# Altium PCB PCB1.PcbDoc (part 4 of 4)
Units mm, origin at the board's own origin, x right, y up, seen from the top; angles counter-clockwise.
Board outline 152.65 x 113.28 mm, 2 copper layers (Top Layer, Bottom Layer); 145 components, 136 nets, 617 pads, 371 vias.
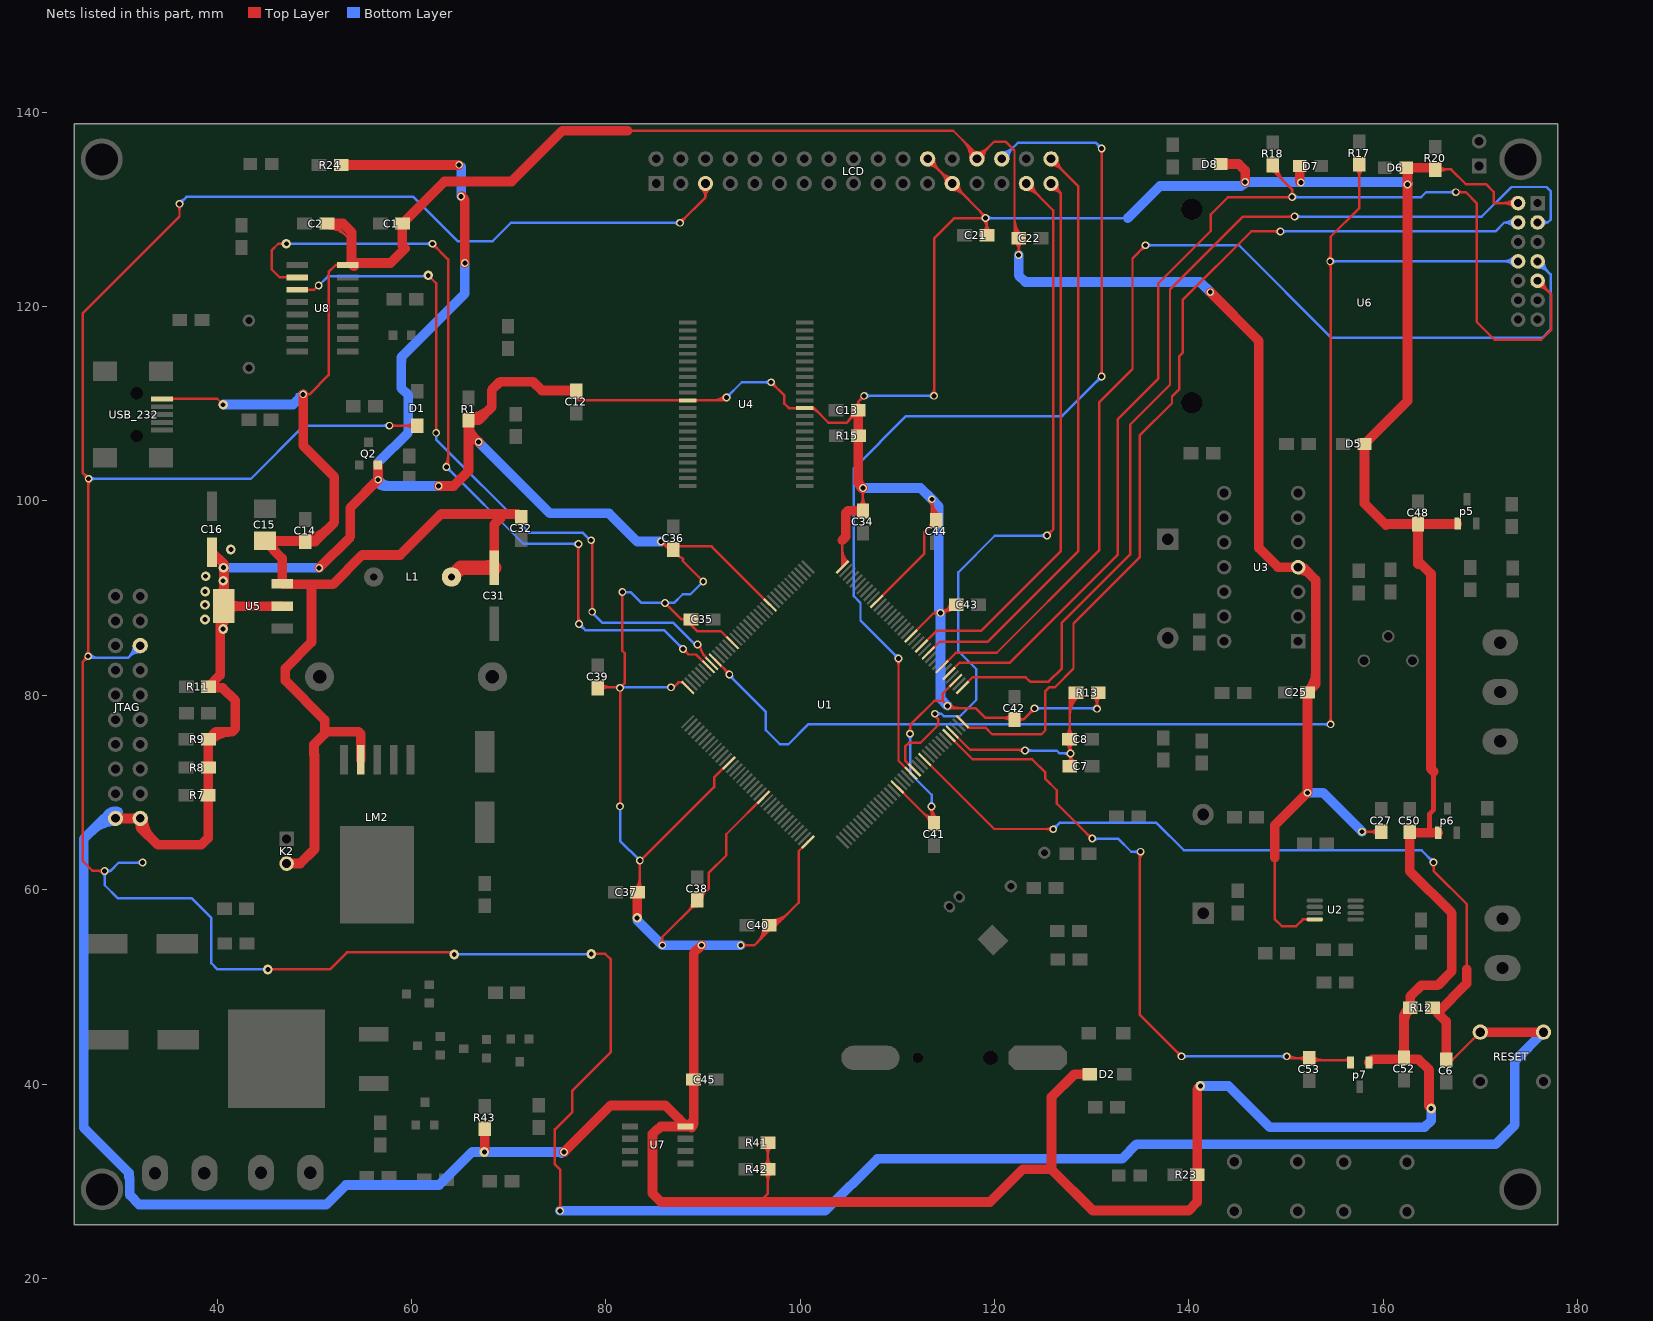
[diagram p4: the nets of this part, all layers, seen from the top]

## Via types
v1: diameter 0.8, hole 0.508, Top Layer to Bottom Layer, 296 vias
v2: diameter 1, hole 0.5, Top Layer to Bottom Layer, 75 vias

## Nets (pads, with @x,y where several pads share a name; then routed paths per layer and width w, separated by ;. In a path a pad name is that pad's centre, name@x,y a point inside that pad or via, vN(x,y) a via of type N, cw(c..) or ccw(c..) an arc to the next point about the centre after c; other vN are vias at no path point) (continued)
RESET: C6.1 D1.1 JTAG.15 LCD.5 R12.1 RESET.1 U1.25 | length 510.3
  Top Layer w0.254: v1@26.448,84.023 cw(c25.789,84.023) 26.255,83.557 cw(c26.721,83.091) v1@26.721,83.75 ; v1@26.499,102.286 ccw(c25.84,102.286) 26.306,102.752 ccw(c26.772,103.218) v1@26.772,102.559 ; v1@26.528,84.216 ccw(c26.062,84.682) 26.721,84.682 ccw(c27.38,84.682) v1@26.914,84.216 ; v1@26.579,102.093 cw(c26.235,101.749) 26.721,101.749 ; 26.721,101.504 cw(c27.553,101.504) v1@26.965,102.093 ; 27.702,61.951 cw(c27.702,61.205) v1@28.23,61.732 ; 27.825,61.951 ccw(c27.825,62.523) v1@28.23,62.118 ; v1@28.372,61.951 27.153,61.951 26.162,62.941 26.162,83.464 v1(26.721,84.023) 26.721,102.337 26.187,102.87 26.187,119.329 36.119,129.261 v1(36.119,130.581) ; v1@35.926,130.388 cw(c35.46,129.922) 36.119,129.922 cw(c36.778,129.922) v1@36.312,130.388 ; v2(45.212,51.791) 51.587,51.791 53.34,53.543 64.186,53.543 v2(64.389,53.34) ; v1(57.709,107.747) D1.1@60.579,107.747 ; v1@57.902,107.554 cw(c58.368,107.088) 58.368,107.747 cw(c58.368,108.406) v1@57.902,107.94 ; D1.1@60.209,107.377 ccw(c59.316,106.484) 59.316,107.747 ccw(c59.316,109.009) D1.1@60.209,108.117 ; v1@75.093,27.142 ccw(c74.627,27.608) 75.286,27.608 ccw(c75.945,27.608) v1@75.479,27.142 ; v1(75.286,26.949) 75.286,31.191 74.752,31.725 74.752,35.331 76.556,37.135 76.556,39.319 80.518,43.282 80.518,52.807 79.934,53.391 v2(78.486,53.391) ; v1(87.63,128.626) 90.246,131.242 ; v1@87.63,128.899 ccw(c87.63,129.558) 88.096,129.092 ccw(c88.562,128.626) v1@87.903,128.626 ; LCD.5@89.82,132.16 cw(c89.045,131.242) 90.246,131.242 ; LCD.5@89.984,132.354 cw(c89.507,131.789) 90.246,131.789 cw(c90.986,131.789) LCD.5@90.508,132.354 ; LCD.5@90.246,132.664 90.246,131.242 ; LCD.5@90.672,132.16 ccw(c91.448,131.242) 90.246,131.242 ; U1.25@112.809,73.401 119.967,66.243 v1@126.035,66.243 ; 125.314,66.243 cw(c125.314,65.497) v1@125.842,66.025 ; 125.437,66.243 ccw(c125.437,66.816) v1@125.842,66.411 ; v1@164.983,62.621 cw(c164.517,62.155) 165.176,62.155 cw(c165.835,62.155) v1@165.369,62.621 ; v1(165.176,62.814) 165.176,61.925 168.58,58.522 168.58,51.791 ; 167.132,42.494 RESET.1@169.977,45.339 ; RESET.1@176.01,44.872 ccw(c174.882,43.745) 174.882,45.339 ccw(c174.882,46.933) RESET.1@176.01,45.806 ; RESET.1@176.189,45.052 ccw(c175.496,44.358) 175.496,45.339 ccw(c175.496,46.32) RESET.1@176.189,45.626
  Top Layer w1: C6.1@166.47,42.494 166.47,46.434 165.571,47.334 168.58,50.343 168.58,51.791 ; RESET.1@169.977,45.339 RESET.1@176.477,45.339
  Bottom Layer w0.254: v1(26.721,84.023) 26.873,83.871 30.836,83.871 JTAG.15@32.08,85.115 ; v1@26.734,84.037 ccw(c27.135,84.437) 27.135,83.871 ; v1(26.772,102.286) 43.459,102.286 48.92,107.747 v1(57.709,107.747) ; v1@26.914,84.216 ccw(c27.748,85.05) 27.748,83.871 ; v1@26.965,102.093 cw(c27.431,101.627) 27.431,102.286 cw(c27.431,102.945) v1@26.965,102.479 ; v1@28.23,61.732 cw(c27.764,61.266) 28.423,61.266 cw(c29.082,61.266) v1@28.616,61.732 ; v1@28.632,61.75 cw(c29.007,61.437) 29.007,61.925 ; v1@28.632,62.1 ccw(c29.007,62.414) 29.007,61.925 ; JTAG.15@31.42,85.115 cw(c29.825,85.115) 30.953,83.988 cw(c32.08,82.861) JTAG.15@32.08,84.455 ; JTAG.15@31.674,85.115 cw(c30.693,85.115) 31.386,84.422 cw(c32.08,83.728) JTAG.15@32.08,84.709 ; v1@32.141,62.596 ccw(c31.675,62.13) 31.675,62.789 ccw(c31.675,63.448) v1@32.141,62.982 ; v1(32.334,62.789) 29.87,62.789 29.007,61.925 ; v1(36.119,130.581) 36.83,131.293 60.198,131.293 64.745,126.746 68.351,126.746 70.231,128.626 v1(87.63,128.626) ; v1@36.119,130.854 ccw(c36.119,131.513) 36.585,131.047 ccw(c37.051,130.581) v1@36.392,130.581 ; v2(45.212,51.791) 40.03,51.791 39.395,52.426 39.395,57.074 37.338,59.131 29.743,59.131 28.423,60.452 v1(28.423,61.925) 29.007,61.925 ; v1@57.516,107.554 ccw(c57.05,107.088) 57.05,107.747 ccw(c57.05,108.406) v1@57.516,107.94 ; v2@64.389,53.365 v2@78.461,53.365 ; v1@75.479,26.756 cw(c75.945,26.29) 75.945,26.949 cw(c75.945,27.608) v1@75.479,27.142 ; v1@87.437,128.433 ccw(c86.971,127.967) 86.971,128.626 ccw(c86.971,129.285) v1@87.437,128.819 ; v1(126.035,66.218) 126.695,66.878 136.652,66.878 139.471,64.059 163.932,64.059 v1(165.176,62.814) ; v1@126.035,66.491 ccw(c126.035,67.15) 126.501,66.684 ccw(c126.967,66.218) v1@126.308,66.218 ; v1@164.903,62.814 ccw(c164.244,62.814) 164.71,63.28 ccw(c165.176,63.746) v1@165.176,63.087
  Bottom Layer w1: v1(75.286,26.949) 102.565,26.949 107.925,32.309 133.121,32.309 134.62,33.807 171.577,33.807 173.533,35.763 173.533,42.395 RESET.1@176.477,45.339
RXD: U1.101 U8.3 | length 71.5
  Top Layer w0.254: U8.3@48.225,121.742 49.987,121.742 v1@50.267,122.022 ; v2(61.722,123.215) 62.535,122.403 v1@62.535,107.264 ; v1(78.588,88.595) v1@78.588,95.86 ; v1@89.706,85.217 ccw(c91.479,85.217) 90.226,83.963
  Bottom Layer w0.254: v1(50.444,122.174) 51.384,123.114 61.62,123.114 v2(61.722,123.215) ; v1(62.535,107.01) 62.535,106.324 72.111,96.749 77.597,96.749 v1@78.359,95.987 ; v1@78.613,88.468 79.604,87.478 86.919,87.478 v1@89.179,85.217
  other v1: 89.433,85.217 78.486,95.961
RXD2: U1.37 U6.3 | length 106.4
  Top Layer w0.254: U1.37@116.698,80.825 117.737,81.864 123.19,81.864 123.647,81.407 125.552,81.407 126.924,82.779 126.924,87.478 133.934,94.488 133.934,107.848 138.049,111.963 138.049,121.768 145.542,129.261 v1(150.876,129.261) ; v1@150.683,129.068 ccw(c150.217,128.602) 150.217,129.261 ccw(c150.217,129.92) v1@150.683,129.454
  Bottom Layer w0.254: v1(150.876,129.261) 170.129,129.261 173.177,132.309 176.784,132.309 177.241,131.851 177.241,128.981 176.918,128.658 ; v1@151.069,129.068 cw(c151.535,128.602) 151.535,129.261 cw(c151.535,129.92) v1@151.069,129.454 ; U6.3@175.87,128.658 176.918,128.658 ; U6.3@176.417,128.36 cw(c176.918,128.088) 176.918,128.658 ; U6.3@176.417,128.955 ccw(c176.918,129.227) 176.918,128.658
T_CS: LCD.33 U1.49 | length 59.9
  Top Layer w0.254: U1.49@112.455,85.068 114.027,86.639 118.618,86.639 126.797,94.818 126.797,131.674 ; LCD.33@125.806,132.664 126.797,131.674 ; LCD.33@125.845,132.26 cw(c125.913,131.552) 126.416,132.055 cw(c126.919,132.557) LCD.33@126.211,132.625 ; LCD.33@125.869,132.007 cw(c125.98,130.857) 126.797,131.674 ; LCD.33@126.464,132.601 ccw(c127.614,132.491) 126.797,131.674
T_MOSI: LCD.30 U1.21 | length 108.2
  Top Layer w0.254: v1@109.916,83.602 cw(c109.45,83.136) 110.109,83.136 cw(c110.768,83.136) v1@110.302,83.602 ; v1(110.109,83.795) 110.109,73.272 U1.21@111.395,71.987 ; v1@130.82,112.994 ccw(c130.354,113.46) 131.013,113.46 ccw(c131.672,113.46) v1@131.206,112.994 ; v1@130.82,136.078 cw(c130.354,135.612) 131.013,135.612 cw(c131.672,135.612) v1@131.206,136.078 ; v1@130.962,136.322 v1(131.013,136.271) v1(131.013,112.801)
  Bottom Layer w0.254: v1@109.836,83.795 ccw(c109.177,83.795) 109.643,84.261 ccw(c110.109,84.727) v1@110.109,84.068 ; v1(110.109,83.795) 106.197,87.706 106.197,89.51 105.512,90.195 105.512,103.353 110.896,108.737 126.949,108.737 v1(131.013,112.801) ; LCD.30@120.726,135.204 122.377,136.855 130.429,136.855 v1(131.013,136.271) ; LCD.30@120.726,135.611 ccw(c120.726,136.592) 121.42,135.898 ccw(c122.114,135.204) LCD.30@121.133,135.204 ; LCD.30@120.726,135.865 ccw(c120.726,137.459) 121.854,136.332 ccw(c122.981,135.204) LCD.30@121.387,135.204 ; v1@130.74,112.801 cw(c130.081,112.801) 130.547,112.335 cw(c131.013,111.869) v1@131.013,112.528 ; v1@130.74,136.271 ccw(c130.081,136.271) 130.547,136.737 ccw(c131.013,137.203) v1@131.013,136.544
T_PEN: LCD.31 U1.22 | length 83.2
  Top Layer w0.254: U1.22@111.748,72.34 110.795,73.294 110.795,74.727 111.176,75.108 112.344,75.108 114.198,76.962 114.198,77.546 113.843,77.902 v1(113.843,78.105) ; v1@114.068,77.951 ccw(c114.266,77.817) 114.097,77.648 ; LCD.31@123.266,132.004 cw(c123.266,130.409) 124.394,131.537 cw(c125.521,132.664) LCD.31@123.927,132.664 ; LCD.31@123.266,132.258 cw(c123.266,131.277) 123.96,131.97 cw(c124.654,132.664) LCD.31@123.673,132.664 ; LCD.31@123.266,132.664 126.035,129.896 126.035,97.079 v1(125.4,96.444) ; v1@125.4,96.717 ccw(c125.4,97.376) 125.866,96.91 ccw(c126.332,96.444) v1@125.673,96.444
  Bottom Layer w0.254: v1(113.843,78.105) 114.529,78.105 114.783,77.851 116.434,77.851 118.11,79.527 118.11,82.702 116.256,84.557 116.256,92.659 120.015,96.418 v1@125.4,96.418 ; v1@114.036,77.912 cw(c114.502,77.446) 114.502,78.105 cw(c114.502,78.764) v1@114.036,78.298 ; 124.679,96.418 ccw(c124.679,97.164) v1@125.207,96.637 ; 124.802,96.418 cw(c124.802,95.846) v1@125.207,96.251
T_SCK: LCD.34 U1.47 | length 65.4
  Top Layer w0.254: U1.47@113.163,84.361 113.19,84.361 114.351,85.522 119.304,85.522 128.6,94.818 128.6,132.41 LCD.34@125.806,135.204 ; LCD.34@125.806,134.544 cw(c125.806,132.949) 126.934,134.077 cw(c128.061,135.204) LCD.34@126.467,135.204 ; LCD.34@125.806,134.798 cw(c125.806,133.817) 126.5,134.51 cw(c127.194,135.204) LCD.34@126.213,135.204
TXD: U1.102 U8.2 | length 97.7
  Top Layer w0.254: v2(47.117,126.467) 46.279,126.467 45.593,125.781 45.593,123.85 46.431,123.012 U8.2@48.225,123.012 ; v1@62.154,126.194 cw(c62.154,125.535) 62.62,126.001 cw(c63.086,126.467) v1@62.427,126.467 ; v1(62.154,126.467) 63.754,124.866 63.754,103.683 v1(63.576,103.505) ; v1@63.383,103.698 ccw(c62.488,104.593) 63.754,104.593 ; v1@63.563,103.518 ccw(c63.101,103.98) 63.754,103.98 ; v1@76.972,95.387 cw(c76.506,94.921) 77.165,94.921 cw(c77.824,94.921) v1@77.358,95.387 ; v1@77.048,87.544 ccw(c76.766,87.826) 77.165,87.826 ; 77.165,88.194 ccw(c78.084,88.194) v1@77.434,87.544 ; v1(77.165,95.58) 77.165,87.427 v1(77.241,87.351) ; v1@87.935,84.487 cw(c87.935,83.828) 88.401,84.294 cw(c88.867,84.76) v1@88.208,84.76 ; v1(87.935,84.76) 88.494,84.201 89.281,84.201 U1.102@90.535,82.947
  Bottom Layer w0.254: v2@46.888,126.467 v2(47.117,126.467) v1(62.154,126.467) ; v2@47.081,126.274 cw(c47.547,125.808) 47.547,126.467 cw(c47.547,127.126) v2@47.081,126.66 ; v1@61.961,126.274 ccw(c61.495,125.808) 61.495,126.467 ccw(c61.495,127.126) v1@61.961,126.66 ; v1@63.576,103.232 cw(c63.576,102.573) 64.042,103.039 cw(c64.508,103.505) v1@63.849,103.505 ; v1(63.576,103.505) 71.488,95.593 v1@77.127,95.593 ; 76.475,95.593 cw(c76.475,94.89) v1@76.972,95.387 ; 76.537,95.593 ccw(c76.537,96.209) v1@76.972,95.773 ; v1@77.241,87.078 cw(c77.241,86.419) 77.707,86.885 cw(c78.173,87.351) v1@77.514,87.351 ; v1(77.241,87.351) 77.876,86.716 85.979,86.716 v1(87.935,84.76) ; v1@87.662,84.76 ccw(c87.003,84.76) 87.469,85.226 ccw(c87.935,85.692) v1@87.935,85.033
TXD2: U1.36 U6.4 | length 103.8
  Top Layer w0.254: U1.36@116.171,77.817 117.305,76.683 119.05,76.683 119.736,75.997 124.816,75.997 125.222,76.403 125.222,80.43 125.615,80.823 126.187,80.823 128.118,82.753 128.118,87.376 134.925,94.183 134.925,106.731 138.252,110.058 138.252,110.769 139.014,111.531 139.014,114.91 139.344,115.24 139.344,120.675 146.406,127.737 v1(149.403,127.737) ; v1@149.21,127.544 ccw(c148.744,127.078) 148.744,127.737 ccw(c148.744,128.396) v1@149.21,127.93
  Bottom Layer w0.254: v1(149.403,127.737) 171.526,127.737 172.447,128.658 ; v1@149.596,127.544 cw(c150.062,127.078) 150.062,127.737 cw(c150.062,128.396) v1@149.596,127.93 ; U6.4@173.412,128.235 ccw(c172.447,127.345) 172.447,128.658 ; U6.4@173.412,129.08 cw(c172.447,129.97) 172.447,128.658 ; U6.4@173.598,128.407 ccw(c173.027,127.88) 173.027,128.658 ccw(c173.027,129.435) U6.4@173.598,128.908 ; U6.4@173.87,128.658 172.447,128.658
VCC3.3: C12.2 C13.2 C16.A C21.1 C34.2 C35.2 C36.2 C37.2 C38.2 C39.2 C40.2 C41.2 C42.2 C43.2 C44.2 C45.2 C48.2 C50.2 C52.2 D2.1 D5.A D6.A D7.A D8.A JTAG.1 JTAG.2 LCD.24 LCD.25 p5.1 p6.1 p7.1 Q2.1 R1.2 R7.1 R8.1 R9.1 R11.1 R12.2 R13.2 R15.2 R20.2 R23.2 R24.2 R41.2 R42.2 R43.2 U1.17 U1.39 U1.52 U1.62 U1.72 U1.84 U1.95 U1.108 U1.121 U1.131 U1.144 U4.11 U4.33 U5.2 U6.2 U7.8 | length 1086.1
  Top Layer w0.254: R8.1@39.316,72.569 R8.1@39.343,72.569 ; 40.335,84.531 40.335,84.861 ; C12.2@76.809,111.458 C12.2@76.938,111.328 ; C12.2@76.989,110.566 77.207,110.349 U4.33@88.441,110.349 92.111,110.349 v1(92.405,110.642) ; C39.2@79.324,81.053 ccw(c79.881,81.609) 79.881,80.823 ; C39.2@79.504,80.514 cw(c80.249,79.77) 80.249,80.823 ; C39.2@79.504,81.233 ccw(c80.494,82.223) 80.494,80.823 ; C39.2@79.754,80.823 v1@81.407,80.823 ; v1(81.458,68.58) v1(81.458,80.772) 81.915,81.229 81.915,84.353 81.686,84.582 v1(81.686,90.627) ; C37.2@83.029,60.098 ccw(c81.886,61.242) 83.502,61.242 ; C37.2@83.114,59.253 cw(c83.055,59.055) 83.261,59.055 ; C37.2@83.209,59.919 ccw(c82.499,60.628) 83.502,60.628 ; C37.2@83.261,59.739 83.261,59.055 ; C37.2@83.408,59.253 ccw(c83.468,59.055) 83.261,59.055 ; C37.2@83.502,60.234 v1@83.502,62.928 ; 83.502,60.69 ccw(c84.339,60.69) C37.2@83.747,60.098 ; v1@83.528,62.954 91.135,70.561 91.135,71.526 U1.121@93.155,73.545 ; v1@85.608,54.473 ccw(c85.142,54.939) 85.801,54.939 ccw(c86.46,54.939) v1@85.994,54.473 ; v1@85.674,95.561 cw(c85.674,94.902) 86.14,95.368 cw(c86.606,95.834) v1@85.947,95.834 ; v1(85.674,95.834) C36.2@86.487,95.021 ; v1(85.801,54.28) 85.801,55.118 89.406,58.723 C38.2@89.406,58.928 90.576,60.098 90.576,61.714 92.38,63.518 92.38,65.7 U1.131@96.741,70.061 ; 85.966,95.543 ccw(c86.293,95.87) C36.2@86.603,95.526 ; v1(86.081,89.51) 87.781,87.809 C35.2@88.748,87.809 ; 86.155,95.354 ccw(c86.472,95.671) C36.2@86.773,95.337 ; v1(86.69,80.823) 86.944,80.823 87.452,81.331 87.909,81.331 U1.108@88.414,80.825 ; C36.2@86.972,94.387 cw(c87.047,93.116) 87.947,94.017 ; C36.2@87.247,95.326 90.884,95.326 U1.84@96.899,89.311 ; 87.884,94.08 87.884,93.853 v1(90.018,91.719) ; C35.2@88.341,87.301 88.695,87.301 89.381,86.616 91.816,86.616 U1.95@93.01,85.422 ; 88.484,57.801 ccw(c87.484,58.801) C38.2@88.898,58.801 ; 88.672,57.989 cw(c89.406,57.254) C38.2@89.406,58.293 ; C38.2@88.918,58.235 ccw(c88.351,58.801) C38.2@89.152,58.801 ; C38.2@89.406,59.309 ccw(c89.406,60.229) 90.057,59.578 ; C38.2@89.406,59.563 ccw(c89.406,61.096) 90.49,60.012 ; C38.2@89.914,59.055 cw(c90.834,59.055) 90.184,59.705 ; 91.037,110.349 ccw(c91.037,112.011) v1@92.212,110.835 ; 91.65,110.349 ccw(c91.65,111.398) v1@92.392,110.656 ; v1(93.878,54.28) 95.275,54.28 96.799,55.804 C40.2@96.799,56.336 97.509,56.336 99.847,58.674 99.847,63.975 U1.144@100.788,64.916 ; v1@94.071,54.087 cw(c94.537,53.621) 94.537,54.28 cw(c94.537,54.939) v1@94.071,54.473 ; 95.605,54.609 ccw(c94.203,56.011) C40.2@96.169,56.269 ; 95.783,27.864 96.672,28.753 R42.2@96.672,31.24 R41.2@96.672,33.958 ; 95.969,54.974 ccw(c94.847,56.096) C40.2@96.421,56.303 ; R42.2@96.313,30.881 cw(c95.446,30.014) 96.672,30.014 cw(c97.899,30.014) R42.2@97.032,30.881 ; R42.2@96.313,31.6 ccw(c95.446,32.467) 96.672,32.467 ccw(c97.899,32.467) R42.2@97.032,31.6 ; R41.2@96.313,33.599 cw(c95.446,32.732) 96.672,32.732 cw(c97.899,32.732) R41.2@97.032,33.599 ; 96.334,55.338 ccw(c95.491,56.18) C40.2@96.672,56.336 ; C40.2@96.926,56.336 ccw(c96.926,57.742) 97.921,56.748 ; C40.2@96.926,56.59 ccw(c96.926,58.609) 98.355,57.181 ; C40.2@96.926,56.844 ccw(c96.926,59.476) 98.788,57.615 ; v1@97.003,111.944 cw(c97.003,111.285) 97.469,111.751 cw(c97.935,112.217) v1@97.276,112.217 ; v1(97.003,112.217) 98.374,110.846 98.374,110.007 98.833,109.549 U4.11@100.441,109.549 101.398,109.549 102.895,108.052 104.775,108.052 105.969,109.245 C13.2@105.969,109.345 105.969,110.211 ; U4.11@101.141,109.476 cw(c101.141,108.677) 101.705,109.242 ; U4.11@101.171,109.482 cw(c101.305,109.197) 101.527,109.42 ; U1.72@104.324,93.2 104.324,95.961 ; U1.72@104.324,93.226 ccw(c104.35,93.226) U1.72@104.332,93.208 ; 104.324,93.84 ccw(c104.964,93.84) U1.72@104.511,93.387 ; 104.324,94.453 ccw(c105.577,94.453) U1.72@104.691,93.567 ; 104.324,95.066 ccw(c106.19,95.066) U1.72@104.87,93.746 ; 104.889,108.165 ccw(c103.808,109.246) C13.2@105.334,109.321 ; 105.294,108.57 ccw(c104.581,109.284) C13.2@105.588,109.333 ; 105.362,108.639 cw(c105.842,108.159) C13.2@105.842,108.837 ; C13.2@105.721,109.789 ccw(c105.486,110.211) 105.969,110.211 ; C34.2@106.094,99.47 ccw(c105.227,100.337) 106.453,100.337 ccw(c107.679,100.337) C34.2@106.812,99.47 ; C13.2@106.216,109.789 cw(c106.452,110.211) 105.969,110.211 ; v1@106.26,101.153 cw(c105.794,100.687) 106.453,100.687 cw(c107.112,100.687) v1@106.646,101.153 ; v1@106.305,110.82 cw(c105.646,110.82) 106.112,110.354 cw(c106.578,109.888) v1@106.578,110.547 ; C34.2@106.453,98.984 v1(106.453,101.346) ; v1(106.578,110.82) 105.969,110.211 ; U1.62@107.859,89.664 112.776,94.581 112.776,96.798 C44.2@113.997,98.019 113.538,98.477 v1(113.538,100.178) ccw(c115.649,100.178) C44.2@114.317,98.54 ; U1.17@109.981,70.572 113.513,67.04 v1(113.513,68.555) ccw(c115.063,68.555) C41.2@114.088,67.349 ; v1@111.11,76.241 ccw(c110.644,76.707) 111.303,76.707 ccw(c111.962,76.707) v1@111.496,76.241 ; v1(111.303,76.048) 111.303,76.937 113.792,79.426 114.656,79.426 114.664,79.418 ; U1.52@111.395,86.129 113.734,88.468 ; 112.612,67.942 ccw(c113.768,69.098) C41.2@113.768,67.462 ; 112.913,96.935 cw(c113.997,95.851) C44.2@113.997,97.384 ; 113.021,67.532 cw(c112.443,66.954) C41.2@113.26,66.954 ; 113.045,67.508 ccw(c113.768,68.231) C41.2@113.768,67.208 ; LCD.24@113.106,134.544 cw(c113.106,132.949) 114.234,134.077 cw(c115.361,135.204) LCD.24@113.767,135.204 ; LCD.24@113.106,134.798 cw(c113.106,133.817) 113.8,134.51 cw(c114.494,135.204) LCD.24@113.513,135.204 ; LCD.24@113.106,135.204 LCD.25@115.646,132.664 v1@119.139,129.172 ; 113.219,97.241 ccw(c112.569,97.892) C44.2@113.489,97.892 ; v1@113.32,68.362 cw(c112.854,67.896) 113.513,67.896 cw(c114.172,67.896) v1@113.706,68.362 ; v1@113.345,99.985 cw(c112.879,99.519) 113.538,99.519 cw(c114.197,99.519) v1@113.731,99.985 ; 113.346,97.368 cw(c113.997,96.718) C44.2@113.997,97.638 ; C41.2@113.409,67.314 ccw(c113.159,67.564) C41.2@113.513,67.564 ; C41.2@113.513,67.083 C41.2@113.768,66.827 ; 113.513,68.022 ccw(c114.632,68.022) C41.2@113.928,67.152 ; 113.538,99.11 ccw(c114.781,99.11) C44.2@113.997,98.146 ; 113.538,99.644 ccw(c115.215,99.644) C44.2@114.157,98.343 ; v1@113.574,111.013 ccw(c113.108,111.479) 113.767,111.479 ccw(c114.426,111.479) v1@113.96,111.013 ; v1(113.767,110.82) 113.767,127 115.875,129.108 v1(119.075,129.108) ; 113.829,88.468 cw(c113.829,87.896) v1@114.234,88.301 ; v1@114.229,88.681 cw(c113.734,89.148) 113.734,88.468 ; v1@114.427,88.468 113.734,88.468 ; v1@114.443,88.483 cw(c114.853,88.197) 114.853,88.697 ; v1@114.651,88.337 cw(c115.34,87.857) 115.34,88.697 ; 114.918,88.697 ccw(c114.918,89.458) C43.2@115.674,89.365 ; LCD.25@114.986,132.664 ccw(c113.391,132.664) 114.519,133.792 ccw(c115.646,134.919) LCD.25@115.646,133.325 ; v1@115.177,78.931 ccw(c115.761,79.516) 115.761,78.689 ; 115.205,88.697 ccw(c115.205,89.423) C43.2@115.926,89.333 ; LCD.25@115.24,132.664 ccw(c114.259,132.664) 114.952,133.358 ccw(c115.646,134.052) LCD.25@115.646,133.071 ; v1@115.357,79.111 ccw(c116.375,80.129) 116.375,78.689 ; C43.2@115.421,89.396 cw(c114.63,89.494) 114.63,88.697 115.34,88.697 ; C43.2@115.453,89.147 cw(c115.086,89.001) 115.365,88.722 cw(c115.687,88.401) C43.2@115.8,88.841 ; LCD.25@115.646,132.004 cw(c115.646,130.409) 116.774,131.537 cw(c117.901,132.664) LCD.25@116.307,132.664 ; LCD.25@115.646,132.258 cw(c115.646,131.277) 116.34,131.97 cw(c117.034,132.664) LCD.25@116.053,132.664 ; C43.2@115.9,89.257 115.34,88.697 ; U1.39@115.991,81.533 114.664,80.205 114.664,79.418 ; 118.519,129.791 cw(c117.837,129.108) v1@118.802,129.108 ; 118.826,129.484 ccw(c119.075,129.734) v1@119.075,129.381 ; C21.1@118.843,127.691 ccw(c117.976,128.558) 119.202,128.558 ccw(c120.429,128.558) C21.1@119.561,127.691 ; v1@118.882,129.301 cw(c118.416,129.767) 118.416,129.108 cw(c118.416,128.449) 118.882,128.915 cw(c118.11,128.143) 119.202,128.143 ; C21.1@119.202,127.332 v1@119.202,129.108 ; 120.696,77.699 cw(c120.696,76.299) C42.2@121.686,77.289 ; 120.942,77.699 ccw(c120.942,78.752) C42.2@121.686,78.007 ; 121.31,77.699 cw(c121.31,76.912) C42.2@121.866,77.468 ; C42.2@122.476,77.252 cw(c122.961,76.949) 122.961,77.521 ; C42.2@122.476,77.79 ccw(c122.961,78.093) 122.961,77.521 ; v1@123.831,78.664 cw(c123.172,78.664) 123.638,78.198 cw(c124.104,77.732) v1@124.104,78.391 ; v1(124.104,78.664) 122.961,77.521 ; R13.2@130.171,79.903 cw(c129.304,79.036) 130.531,79.036 cw(c131.757,79.036) R13.2@130.89,79.903 ; v1@130.338,78.806 ccw(c129.872,79.272) 130.531,79.272 ccw(c131.19,79.272) v1@130.724,78.806 ; v1(130.531,78.613) 130.531,80.135 R13.2@130.658,80.262 ; D7.A@151.41,134.466 D7.A@151.511,134.365 ; 163.703,50.165 163.932,50.165 ; R20.2@165.352,134.112 166.98,134.112 168.478,132.613 170.561,132.613 171.349,131.825 171.349,130.658 U6.2@173.87,130.658 ; p6.1@165.542,65.964 p6.1@165.649,65.857 ; R20.2@165.712,133.753 cw(c166.579,132.886) 166.579,134.112 cw(c166.579,135.338) R20.2@165.712,134.471 ; p5.1@167.61,97.638 p5.1@167.655,97.683 ; U6.2@173.429,130.217 ccw(c172.366,129.154) 172.366,130.658 ccw(c172.366,132.162) U6.2@173.429,131.098 ; U6.2@173.609,130.397 ccw(c172.979,129.767) 172.979,130.658 ccw(c172.979,131.548) U6.2@173.609,130.919 ; 114.664,79.418 v1(115.164,78.918) 115.392,78.689 118.034,78.689 119.024,77.699 121.868,77.699 C42.2@122.045,77.521 122.961,77.521
  Top Layer w0.5: 164.44,65.857 164.77,66.187 164.77,67.818 165.176,68.224 165.176,72.161
  Top Layer w1: JTAG.2@29.54,67.335 JTAG.1@32.08,67.335 32.08,66.421 33.884,64.618 38.354,64.618 39.065,65.329 R7.1@39.065,69.725 39.065,72.544 R8.1@39.091,72.569 ; JTAG.1@32.368,67.335 ccw(c35.269,67.335) 33.217,65.284 ; R9.1@39.313,75.37 cw(c41.441,73.242) 41.441,76.251 ; R8.1@39.316,72.795 R8.1@39.091,72.569 ; C16.A@39.458,94.693 cw(c39.459,94.604) C16.A@39.522,94.667 ; C16.A@39.472,94.717 40.688,93.5 U5.2@40.688,89.179 ; U5.2@40.264,90.254 ccw(c39.239,91.278) 40.688,91.278 ccw(c42.137,91.278) U5.2@41.112,90.254 ; 40.31,86.168 cw(c43.05,86.168) U5.2@41.112,88.105 ; U5.2@41.112,88.755 cw(c42.137,87.731) 42.137,89.179 cw(c42.137,90.628) U5.2@41.112,89.604 ; U5.2@46.688,89.179 U5.2@40.688,89.179 ; v1(50.495,93.116) 53.696,96.317 53.696,99.314 v1(56.566,102.184) 56.566,103.661 Q2.1@56.525,103.702 ; R24.2@52.756,134.568 v1@64.87,134.568 ; v1(62.789,101.549) 64.338,101.549 65.862,103.073 65.862,107.112 ; v1@65.171,131.414 cw(c64.422,130.665) 65.481,130.665 ; v1(65.481,124.485) 65.481,130.962 ; R1.2@65.861,108.568 ccw(c65.861,111.718) 68.088,109.49 ; R1.2@65.862,108.304 R1.2@65.861,108.306 ; R1.2@65.99,108.139 ccw(c67.456,107.688) 66.371,106.603 ; v1(66.904,106.07) 65.862,107.112 ; v2(67.488,32.995) 67.537,33.044 R43.2@67.537,35.408 ; v1(75.692,32.995) 80.493,37.795 86.131,37.795 88.29,35.636 88.417,35.636 89.027,36.246 C45.2@89.027,40.464 89.027,53.467 v1(89.84,54.28) ; C12.2@76.809,111.458 76.73,111.379 73.406,111.379 72.517,112.268 69.113,112.268 68.25,111.404 68.25,109.652 66.904,108.306 R1.2@65.861,108.306 ; v2(83.21,57.099) 83.21,59.688 C37.2@83.261,59.739 ; 87.536,36.391 cw(c86.781,35.636) U7.8@87.848,35.636 ; U7.8@88.174,35.636 85.649,35.636 85.369,35.357 85.293,35.357 84.785,34.849 84.785,28.753 85.674,27.864 95.783,27.864 119.532,27.864 122.885,31.217 125.857,31.217 ; 104.324,95.961 104.673,96.311 104.673,98.755 104.902,98.984 C34.2@106.453,98.984 ; 105.969,102.274 ccw(c107.381,102.274) v1@106.382,101.275 ; C13.2@105.969,109.245 105.969,101.83 v1(106.453,101.346) ; D2.1@129.794,40.996 128.194,40.996 125.857,38.659 125.857,31.217 ; v2(141.173,39.802) 140.843,39.472 R23.2@140.843,30.656 140.843,27.838 139.954,26.949 139.929,26.975 130.099,26.975 125.857,31.217 ; D8.A@143.255,134.672 145.109,134.672 145.783,133.998 v1(145.783,132.829) ; v1@151.41,132.867 D7.A@151.41,134.466 ; p7.1@158.532,42.22 158.856,42.545 163.627,42.545 164.694,41.478 164.694,37.719 v2(164.922,37.49) ; C52.2@162.13,42.697 162.13,47.015 162.763,47.649 R12.2@162.763,47.855 162.763,48.997 163.932,50.165 165.608,50.165 167.056,51.613 167.056,57.582 162.711,61.927 C50.2@162.711,65.964 162.818,65.857 164.44,65.857 p6.1@165.649,65.857 ; 162.13,46.307 cw(c164.185,46.307) R12.2@162.732,47.76 ; 162.13,46.875 cw(c163.065,46.875) R12.2@162.69,47.732 ; 162.297,47.182 ccw(c161.772,47.707) R12.2@162.503,47.832 ; 163.574,93.524 C48.2@163.574,97.638 ; 163.881,93.523 164.897,92.507 164.897,72.441 165.176,72.161 ; R20.2@165.352,134.112 165.173,134.291 D6.A@162.356,134.291 162.484,134.164 v1(162.484,132.563) 162.484,110.289 D5.A@158.063,105.869 158.063,99.747 160.274,97.536 160.376,97.638 C48.2@163.574,97.638 ; p5.1@167.61,97.638 C48.2@163.574,97.638 ; R8.1@39.091,72.569 R9.1@39.091,75.465 39.876,76.251 41.529,76.251 41.859,76.581 41.859,79.477 40.564,80.772 39.219,80.772 R11.1@39.116,80.875 40.31,82.069 40.31,88.801 U5.2@40.688,89.179 ; R1.2@65.861,108.306 65.861,107.113 65.862,107.112 ; U7.8@88.811,35.507 ccw(c88.289,36.029) 89.027,36.029 cw(c88.289,36.029) U7.8@88.811,35.507
  Bottom Layer w0.254: v1(81.458,68.58) 81.458,65.024 v1(83.49,62.992) ; v1@81.509,80.823 v1(86.69,80.823) ; v1(81.686,90.627) 82.525,90.627 83.642,89.51 v1(86.081,89.51) 87.02,89.51 87.909,90.399 88.697,90.399 v1(90.018,91.719) ; v1(92.405,110.642) 93.98,112.217 v1(97.003,112.217) ; v1@92.405,110.915 ccw(c92.405,111.574) 92.871,111.108 ccw(c93.337,110.642) v1@92.678,110.642 ; v1@96.81,112.024 ccw(c96.344,111.558) 96.344,112.217 ccw(c96.344,112.876) v1@96.81,112.41 ; v1(106.578,110.82) v1(113.767,110.82) ; v1@106.771,110.627 cw(c107.237,110.161) 107.237,110.82 cw(c107.237,111.479) v1@106.771,111.013 ; v1@111.11,75.855 cw(c110.644,75.389) 111.303,75.389 cw(c111.962,75.389) v1@111.496,75.855 ; v1(111.303,76.048) 111.303,71.984 113.513,69.774 v1(113.513,68.555) ; v1@113.32,68.748 ccw(c112.854,69.214) 113.513,69.214 ccw(c114.172,69.214) v1@113.706,68.748 ; v1@113.574,110.627 ccw(c113.108,110.161) 113.108,110.82 ccw(c113.108,111.479) v1@113.574,111.013 ; v1(119.075,129.108) 133.706,129.108 ; v1@119.268,128.915 cw(c119.734,128.449) 119.734,129.108 cw(c119.734,129.767) v1@119.268,129.301 ; v1(124.104,78.664) 130.48,78.664 v1(130.531,78.613) ; v1@124.297,78.471 cw(c124.763,78.005) 124.763,78.664 cw(c124.763,79.323) v1@124.297,78.857 ; 129.749,78.664 cw(c129.749,77.831) v1@130.338,78.42 ; 129.994,78.664 ccw(c129.994,79.149) v1@130.338,78.806
  Bottom Layer w1: 27.055,66.019 cw(c29.54,63.533) JTAG.2@29.54,67.048 ; 27.788,66.751 cw(c28.845,65.694) JTAG.2@29.428,67.071 ; 28.762,67.726 cw(c29.54,66.948) JTAG.2@29.54,68.048 ; 28.837,67.8 cw(c29.469,67.168) JTAG.2@29.818,67.992 ; JTAG.2@29.54,67.335 28.372,67.335 26.264,65.227 26.264,35.509 30.929,30.844 30.929,30.421 31.005,30.345 31.005,28.558 31.953,27.61 51.232,27.61 53.238,29.616 62.84,29.616 66.243,33.02 ; v2@40.691,93.116 v1(50.495,93.116) ; v1@56.467,102.167 ccw(c57.201,102.294) 57.201,101.549 ; v1@56.495,102.113 ccw(c57.857,103.476) 57.857,101.549 ; v1(62.789,101.549) 57.201,101.549 ; v1(65.1,131.343) v1@65.1,134.391 ; v1(65.481,124.485) 65.481,121.336 58.928,114.783 58.928,111.633 59.665,110.896 59.665,107.061 56.566,103.962 v1(56.566,102.184) 57.201,101.549 ; 66.269,32.995 v2(67.488,32.995) v1(75.692,32.995) v1@75.438,32.868 ; v1(66.904,106.07) 74.244,98.73 80.315,98.73 83.21,95.834 v1(85.674,95.834) ; v2(83.21,57.099) 83.21,56.871 v1(85.801,54.28) v1(89.84,54.28) v1(93.878,54.28) ; v1(106.453,101.346) 112.37,101.346 v1(113.538,100.178) 114.249,99.466 114.249,88.671 v1(114.427,88.494) 114.427,79.654 v1(115.164,78.918) ; 133.706,129.108 137.008,132.41 145.364,132.41 ; v2(141.173,39.802) 144.069,39.802 148.311,35.56 164.262,35.56 164.922,36.22 v2(164.922,37.49) ; 145.013,132.41 ccw(c145.013,133.598) v1@145.854,132.758 ; v1(145.783,132.829) v1@162.217,132.829 ; 162.082,132.829 cw(c162.082,132.161) v1@162.555,132.633
  other v1: 151.511,132.766 64.897,134.595
  other v2: 40.615,86.817 38.735,87.808 38.735,89.306 38.76,90.678 40.615,91.796 38.811,92.253 40.64,93.142 41.402,94.996
VCC5: C1.2 C2.2 C14.2 C15.A C22.1 C25.1 C27.1 C31.A C32.1 K2.2 L1.1 LCD.28 LM2.4 U2.8 U3.4 U5.3 U8.16 USB_232.1 | length 386.7
  Top Layer w0.254: USB_232.1@34.342,110.515 40.005,110.515 v2(40.615,109.906) ; USB_232.1@35.329,110.428 cw(c35.539,110.218) 35.539,110.515 cw(c35.539,110.812) USB_232.1@35.329,110.602 ; v1@48.844,111.176 v1(48.844,110.973) 49.479,110.973 ; v1@49.042,110.785 cw(c49.479,110.371) 49.479,110.973 ; v1@49.042,111.16 ccw(c49.479,111.575) 49.479,110.973 ; 49.708,91.427 50.914,91.427 ; C2.2@51.283,128.548 52.021,128.548 53.425,127.143 U8.16@53.425,124.282 52.197,124.282 51.46,123.546 51.46,112.954 49.479,110.973 ; C2.2@51.41,128.04 cw(c51.41,125.338) 53.32,127.248 ; C2.2@51.41,128.294 cw(c51.41,126.205) 52.887,127.682 ; C2.2@51.41,128.548 cw(c51.41,127.072) 52.453,128.116 ; U8.16@52.503,124.16 ccw(c52.208,123.865) 52.208,124.282 ccw(c52.208,124.7) U8.16@52.503,124.405 ; U8.16@53.303,124.405 ccw(c53.008,124.7) 53.425,124.7 ccw(c53.843,124.7) U8.16@53.548,124.405 ; 82.22,138.1 115.748,138.1 118.415,135.433 119.964,136.982 121.133,136.982 122.047,136.068 122.047,127.456 C22.1@122.479,127.024 v1(122.479,125.324) ; 116.736,137.112 cw(c114.828,135.204) LCD.28@117.526,135.204 ; 117.169,136.678 cw(c115.695,135.204) LCD.28@117.78,135.204 ; 117.603,136.245 cw(c116.562,135.204) LCD.28@118.034,135.204 ; 117.839,136.008 ccw(c118.186,136.355) 118.186,135.865 ccw(c118.186,137.459) 119.314,136.332 ccw(c120.441,135.204) LCD.28@118.847,135.204 ; LCD.28@118.186,135.611 ccw(c118.186,136.592) 118.88,135.898 ccw(c119.574,135.204) LCD.28@118.593,135.204 ; 122.047,127.76 ccw(c123.088,127.76) C22.1@122.352,127.024 ; 122.047,128.373 ccw(c123.701,128.373) C22.1@122.531,127.203 ; 122.047,128.986 ccw(c124.314,128.986) C22.1@122.711,127.383 ; C22.1@122.12,126.665 cw(c121.252,125.797) 122.479,125.797 cw(c123.705,125.797) C22.1@122.838,126.665 ; v1@122.286,125.517 ccw(c121.82,125.983) 122.479,125.983 ccw(c123.138,125.983) v1@122.672,125.517 ; v1@142.113,121.514 v1@142.164,121.463 ; 148.819,63.322 148.819,56.972 149.555,56.236 151.028,56.236 151.73,56.937 U2.8@152.942,56.937 ; v1(157.81,65.964) C27.1@159.793,65.964 ; v1@158.003,65.771 cw(c158.469,65.305) 158.469,65.964 cw(c158.469,66.623) v1@158.003,66.157 ; C27.1@159.434,65.605 ccw(c158.567,64.737) 158.567,65.964 ccw(c158.567,67.19) C27.1@159.434,66.323
  Top Layer w1: C15.A@45.418,95.565 cw(c46.19,94.793) 46.19,95.885 cw(c46.19,96.977) C15.A@45.418,96.205 ; C15.A@45.55,95.885 ccw(c47.103,95.885) 46.005,94.787 ; K2.2@47.142,62.687 48.539,62.687 50.013,64.16 50.013,73.863 49.962,73.914 49.962,74.93 51.054,76.022 ; v1(48.844,110.973) 48.844,105.689 52.057,102.476 52.057,97.803 50.063,95.809 C14.2@49.046,95.809 48.97,95.885 C15.A@44.907,95.885 46.688,94.104 U5.3@46.688,91.479 46.74,91.427 49.708,91.427 ; C14.2@49.046,96.071 ccw(c49.046,99.16) 51.23,96.976 ; C2.2@51.283,128.548 52.935,128.548 53.848,127.635 53.848,124.358 53.924,124.282 54.125,124.483 57.833,124.483 59.334,125.984 59.055,126.263 C1.2@59.055,128.548 63.375,132.867 70.307,132.867 75.54,138.1 82.22,138.1 ; 53.848,124.71 ccw(c54.654,124.71) U8.16@54.084,124.141 ; LM2.4@54.768,73.353 54.768,76.042 54.559,76.251 51.283,76.251 51.054,76.022 ; 67.81,93.421 cw(c67.81,92.448) C31.A@68.498,93.136 ; C31.A@68.478,93.421 68.504,93.396 68.504,97.587 69.24,98.323 ; C32.1@71.271,98.323 70.941,98.654 63.043,98.654 58.826,94.437 54.915,94.437 51.905,91.427 49.708,91.427 ; v1(142.189,121.488) 147.193,116.484 147.193,95.148 149.149,93.193 U3.4@151.232,93.193 151.719,93.193 153.035,91.877 153.035,81.129 C25.1@152.197,80.291 v1(152.197,69.977) 148.819,66.599 148.819,63.322 ; U3.4@151.232,92.943 cw(c151.232,91.161) 152.491,92.421 ; C25.1@152.228,80.386 ccw(c150.281,82.334) 153.035,82.334 ; 49.708,91.427 49.708,85.471 47.015,82.779 47.015,81.509 51.054,77.47 51.054,76.022
  Top Layer w1.5: L1.1@64.109,92.177 65.074,93.142 C31.A@68.504,93.142
  Bottom Layer w0.254: v1@48.651,110.78 ccw(c48.185,110.314) 48.185,110.973 ccw(c48.185,111.632) v1@48.651,111.166 ; v1(142.189,121.488) v1@142.215,121.514
  Bottom Layer w1: v2@40.64,109.931 47.803,109.931 v1(48.844,110.973) ; v1(122.479,125.324) 122.479,123.215 123.165,122.53 141.148,122.53 v1(142.189,121.488) ; v1(152.197,69.977) 153.797,69.977 v1(157.81,65.964)
VDDA: C7.2 C8.1 R13.1 U1.33 | length 39.8
  Top Layer w0.254: U1.33@115.637,76.229 117.47,74.397 v1@123.063,74.397 ; 122.296,74.397 cw(c122.296,73.477) v1@122.946,74.127 ; 122.664,74.397 ccw(c122.664,74.796) v1@122.946,74.513 ; C8.1@127.352,75.128 cw(c126.485,74.261) 127.711,74.261 cw(c128.938,74.261) C8.1@128.07,75.128 ; C8.1@127.352,75.846 ccw(c126.485,76.714) 127.711,76.714 ccw(c128.938,76.714) C8.1@128.07,75.846 ; C7.2@127.504,73.056 ccw(c126.76,73.8) v1@127.813,73.8 ; v1@127.62,73.823 cw(c127.154,73.357) 127.813,73.357 cw(c128.472,73.357) v1@128.006,73.823 ; v1@127.62,74.209 ccw(c127.399,74.429) 127.711,74.429 ; C8.1@127.711,74.92 ccw(c128.717,74.92) v1@128.006,74.209 ; 127.711,77.748 cw(c130.759,77.748) R13.1@128.604,79.903 ; 127.711,78.361 cw(c130.146,78.361) R13.1@128.424,80.083 ; 127.711,78.975 cw(c129.532,78.975) R13.1@128.245,80.262 ; 127.711,79.588 cw(c128.919,79.588) R13.1@128.065,80.442 ; C7.2@127.737,72.696 127.813,72.773 v1(127.813,74.016) ; 127.813,73.416 ccw(c128.56,73.416) C7.2@128.04,72.879 ; R13.1@127.813,79.995 cw(c127.586,79.854) 127.775,79.665 cw(c128.044,79.396) R13.1@128.13,79.767 ; C7.2@128.217,73.061 cw(c129.141,74.016) v1(127.813,74.016) ; R13.1@128.372,80.262 127.711,79.602 C8.1@127.711,75.487 127.711,74.117 v1(127.813,74.016)
  Bottom Layer w0.254: v1(123.139,74.32) 126.39,74.32 126.695,74.016 v1(127.813,74.016) ; v1@123.332,74.127 cw(c123.798,73.661) 123.798,74.32 cw(c123.798,74.979) v1@123.332,74.513 ; v1@127.62,73.823 ccw(c127.154,73.357) 127.154,74.016 ccw(c127.154,74.675) v1@127.62,74.209
VREF+: C53.2 p7.2 U1.32 | length 80.5
  Top Layer w0.254: U1.32@115.284,75.876 117.754,73.406 123.876,73.406 125.222,72.06 125.222,71.399 126.39,70.231 126.39,68.859 v1@129.997,65.253 ; 129.495,65.755 ccw(c130.048,66.307) v1@130.048,65.526 ; 129.618,65.632 cw(c129.239,65.253) v1@129.775,65.253 ; v1@134.833,63.713 cw(c134.551,63.431) 134.95,63.431 ; 134.95,63.063 cw(c135.869,63.063) v1@135.219,63.713 ; v1@134.95,63.881 134.95,47.117 v1(139.217,42.85) ; v1@138.944,42.85 ccw(c138.285,42.85) 138.751,43.316 ccw(c139.217,43.782) v1@139.217,43.123 ; v1(150.063,42.85) 150.266,42.647 C53.2@152.376,42.647 152.554,42.469 156.383,42.469 p7.2@156.632,42.22 ; v1@150.077,42.863 ccw(c150.6,43.386) 150.6,42.647 ; v1@150.256,43.043 ccw(c151.213,43.999) 151.213,42.647 ; C53.2@152.017,42.287 ccw(c151.15,41.42) 151.15,42.647 ccw(c151.15,43.873) C53.2@152.017,43.006 ; C53.2@152.556,42.699 ccw(c153.112,43.255) 153.112,42.469 ; C53.2@152.735,42.16 cw(c153.48,41.416) 153.48,42.469 ; C53.2@152.735,42.879 ccw(c153.725,43.869) 153.725,42.469 ; 156.03,42.469 ccw(c156.03,43.097) p7.2@156.474,42.653 ; 156.157,42.469 cw(c156.157,42.021) p7.2@156.474,42.338
  Bottom Layer w0.254: v1(130.048,65.253) 130.073,65.227 132.74,65.227 134.061,63.906 v1(135.026,63.906) ; v1@130.241,65.06 cw(c130.646,64.655) 130.646,65.227 ; v1@130.241,65.446 ccw(c130.768,65.973) 130.768,65.227 ; v1@134.833,63.713 ccw(c134.367,63.247) 134.367,63.906 ccw(c134.367,64.565) v1@134.833,64.099 ; v1(139.217,42.85) v1(150.063,42.85) ; v1@139.41,42.657 cw(c139.876,42.191) 139.876,42.85 cw(c139.876,43.509) v1@139.41,43.043 ; v1@149.87,42.657 ccw(c149.404,42.191) 149.404,42.85 ccw(c149.404,43.509) v1@149.87,43.043
WIFI_LINK: R17.2 U1.100 U6.8 | length 160.1
  Top Layer w0.254: U1.100@91.242,83.654 v1@92.721,82.175 ; 92.204,82.692 cw(c91.665,82.153) v1@92.427,82.153 ; 92.307,82.589 ccw(c92.7,82.983) v1@92.7,82.426 ; v1@154.341,124.47 cw(c153.752,123.881) 154.584,123.881 ; v1@154.341,124.856 ccw(c153.752,125.445) 154.584,125.445 ; v1@154.391,77.206 ccw(c153.925,77.672) 154.584,77.672 ccw(c155.243,77.672) v1@154.777,77.206 ; v1(154.584,77.013) 154.584,127.203 157.529,130.148 R17.2@157.529,134.645 ; 154.584,124.127 cw(c155.07,124.127) v1@154.727,124.47 ; 154.584,125.2 ccw(c155.07,125.2) v1@154.727,124.856 ; R17.2@157.17,134.159 cw(c156.303,133.292) 157.529,133.292 cw(c158.756,133.292) R17.2@157.888,134.159
  Bottom Layer w0.254: v1@92.7,81.88 cw(c92.7,81.467) 92.993,81.759 ; v1(92.7,82.153) 92.7,82.052 96.469,78.283 96.469,76.403 97.906,74.966 98.77,74.966 100.816,77.013 v1(154.584,77.013) ; v1@92.973,82.153 ccw(c93.878,82.153) 93.238,81.514 ; v1@154.391,76.82 ccw(c153.925,76.354) 153.925,77.013 ccw(c153.925,77.672) v1@154.391,77.206 ; v1(154.534,124.663) 154.539,124.658 U6.8@173.87,124.658 ; v1@154.727,124.47 cw(c155.179,124.018) 155.179,124.658 ; v1@154.727,124.856 ccw(c155.206,125.336) 155.206,124.658 ; U6.8@173.429,124.217 ccw(c172.366,123.154) 172.366,124.658 ccw(c172.366,126.162) U6.8@173.429,125.098 ; U6.8@173.609,124.397 ccw(c172.979,123.767) 172.979,124.658 ccw(c172.979,125.548) U6.8@173.609,124.919
WIFI_READY: R18.2 U1.41 U6.9 | length 134
  Top Layer w0.254: U1.41@115.284,82.24 116.408,83.364 121.566,83.364 132.69,94.488 132.69,108.433 136.855,112.598 136.855,122.403 142.24,127.787 142.24,129.489 143.993,131.242 v1@150.57,131.242 ; R18.2@148.614,133.934 cw(c148.614,133.624) R18.2@148.833,133.843 ; R18.2@148.614,134.442 ccw(c149.53,134.442) 148.882,133.795 ; R18.2@148.614,134.569 148.614,134.063 150.622,132.055 v1(150.622,131.267) ; R18.2@148.868,134.442 ccw(c150.397,134.442) 149.316,133.361 ; R18.2@149.122,134.442 ccw(c151.264,134.442) 149.749,132.927 ; 149.902,131.242 ccw(c149.902,131.988) 150.429,131.46 ccw(c149.963,131.926) 150.622,131.926 ccw(c151.281,131.926) v1@150.815,131.46 ; 150.024,131.242 cw(c150.024,130.669) v1@150.429,131.074 ; v1(167.462,131.775) 168.478,131.775 169.596,130.658 169.596,118.44 171.45,116.586 176.251,116.586 177.292,117.627 177.292,121.235 U6.9@175.87,122.658 ; v1@167.655,131.582 cw(c168.121,131.116) 168.121,131.775 cw(c168.121,132.434) v1@167.655,131.968 ; U6.9@175.87,122.035 cw(c175.87,120.531) 176.933,121.594 cw(c177.997,122.658) U6.9@176.493,122.658 ; U6.9@175.87,122.289 cw(c175.87,121.398) 176.5,122.028 cw(c177.129,122.658) U6.9@176.239,122.658
  Bottom Layer w0.254: v1(150.622,131.267) 163.906,131.267 164.414,131.775 v1@167.437,131.775 ; v1@150.815,131.074 cw(c151.281,130.608) 151.281,131.267 cw(c151.281,131.926) v1@150.815,131.46 ; v1@167.269,131.582 ccw(c166.803,131.116) 166.803,131.775 ccw(c166.803,132.434) v1@167.269,131.968 ; v1@167.284,131.928 v1@167.437,131.775 ; v1@167.462,131.75 v1@167.437,131.775 ; v1(167.462,131.775) v1@167.437,131.775
WIFI_RESET: U1.43 U6.7 | length 113.9
  Top Layer w0.254: U1.43@114.577,82.947 116.009,84.379 120.218,84.379 130.759,94.92 130.759,110.134 134.188,113.563 134.188,124.968 v1(135.534,126.314) ; v1@135.261,126.314 cw(c134.602,126.314) 135.068,125.848 cw(c135.534,125.382) v1@135.534,126.041
  Bottom Layer w0.254: v1(135.534,126.314) 145.161,126.314 154.686,116.789 176.378,116.789 177.216,117.627 177.216,123.311 U6.7@175.87,124.658 ; v1@135.727,126.121 cw(c136.193,125.655) 136.193,126.314 cw(c136.193,126.973) v1@135.727,126.507 ; U6.7@175.87,124.035 cw(c175.87,122.531) 176.933,123.594 cw(c177.997,124.658) U6.7@176.493,124.658 ; U6.7@175.87,124.289 cw(c175.87,123.398) 176.5,124.028 cw(c177.129,124.658) U6.7@176.239,124.658
pads on no net: BAT1.0 JTAG.11 JTAG.17 JTAG.19 LCD.32 U1.3 U1.5 U1.7 U1.18 U1.19 U1.20 U1.34 U1.69 U1.70 U1.73 U1.74 U1.75 U1.76 U1.91 U1.92 U1.93 U1.98 U1.99 U1.103 U1.104 U1.106 U1.111 U1.112 U1.113 U1.116 U1.123 U1.124 U1.125 U1.126 U1.139 U1.140 U3.5 U3.6 U3.7 U3.8 U3.9 U3.10 U3.12 U3.13 U3.14 U6.0 U6.5 U6.6 U6.11 U6.12 U6.13 U6.14 U8.9 U8.10 U8.11 U8.12 U8.15 USB_232.4 USB_232.6 USB_232.7 USB_232.8 USB_232.9 USB_232.MH1 USB_232.MH2 Y2.

## Polygon pours and split planes (outlines as drawn)
NetP10_2 on Bottom Layer "BottomLayer-NetP10_2" (solid): 39.878,48.285 39.878,36.703 52.705,36.703 52.73,36.728 52.73,48.285 39.878,48.285
GND on Bottom Layer "BottomLayer-GND" (solid): 51.232,60.173 42.215,60.173 42.24,60.147 42.24,53.213 51.054,53.213 51.079,53.188 53.391,55.499 53.391,55.524 61.874,55.524 61.925,55.575 61.874,55.626 61.874,62.611 61.874,66.7 61.824,66.751 51.46,66.751 51.46,60.401 51.232,60.173
AGND on Bottom Layer "BottomLayer-AGND" (solid, pour order 1007): 150.724,41.148 163.424,41.148 163.449,41.173 163.525,41.097 163.525,36.703 150.673,36.703 150.724,36.754 150.724,41.148
AGND on Bottom Layer "BottomLayer-AGND" (solid, pour order 1006): 166.167,67.64 175.59,67.64 175.616,67.666 175.59,67.691 175.59,77.953 166.395,77.953 166.37,77.927 166.167,77.724 166.167,67.64
AGND on Bottom Layer "BottomLayer-AGND" (solid, pour order 1005): 159.004,67.259 164.008,67.259 164.008,71.145 163.982,71.171 158.928,71.171 158.928,67.335 159.004,67.259
AGND on Bottom Layer "BottomLayer-AGND" (solid, pour order 1004): 162.763,99.06 162.763,101.244 175.616,101.244 175.616,99.06 162.763,99.06
VCC3.3 on Bottom Layer "BottomLayer-vcc3.3" (solid, pour order 1002): 38.202,96.317 42.062,96.317 42.062,86.411 38.227,86.411 38.202,86.436 38.202,96.317
NetP10_2 on Top Layer "TopLayer-NetP10_2" (solid): 39.903,48.311 39.903,36.728 52.73,36.728 52.756,36.754 52.73,36.779 52.73,48.285 39.929,48.285 39.903,48.311
GND on Top Layer "TopLayer-GND" (solid): 51.359,66.751 61.9,66.751 61.9,55.905 61.9,55.55 53.391,55.55 52.883,55.042 51.029,53.188 42.24,53.188 42.24,60.147 42.215,60.173 50.927,60.173 51.384,60.173 51.308,60.249 51.308,71.552
AGND on Top Layer "TopLayer-AGND" (solid, pour order 1015): 150.749,41.148 163.449,41.148 163.449,36.728 150.749,36.728 150.698,36.779 150.749,36.83 150.749,41.148
AGND on Top Layer "TopLayer-AGND" (solid, pour order 1014): 166.192,67.64 175.59,67.64 175.59,77.927 175.565,77.953 166.395,77.953
AGND on Top Layer "TopLayer-AGND" (solid, pour order 1013): 159.004,67.285 159.029,67.259 163.982,67.259 163.982,71.095 164.033,71.145 164.008,71.171 158.979,71.171 158.979,67.31 159.004,67.285
AGND on Top Layer "TopLayer-AGND" (solid, pour order 1012): 162.789,99.035 166.954,99.035 175.031,99.035 175.59,98.476 175.59,98.45 175.59,101.168 162.763,101.168 162.763,99.06 162.789,99.035
VCC3.3 on Top Layer "TopLayer-vcc3.3" (solid, pour order 1010): 38.202,96.317 42.088,96.317 42.113,96.342 42.062,96.291 42.062,86.436 38.379,86.436 38.354,86.462 38.202,86.614 38.202,96.317
GND on Top Layer "Top Layer-GND" (solid, pour order 1008): 42.393,58.699 42.393,53.823 42.367,53.797 42.367,52.629

## Silkscreen, mask and mechanical layers (free items; w line width, h text height)
Top Overlay:
  lines w0.254: 26.075,145.309 26.077,144.801 ; 27.598,145.57 26.076,145.055 ; 27.602,144.554 26.076,145.055 ; 91.904,145.331 26.076,145.055 ; 111.76,145.414 177.587,145.69 ; 176.061,146.192 177.587,145.69 ; 176.065,145.176 177.587,145.69 ; 177.586,145.944 177.588,145.436 ; 182.382,137.284 182.88,138.811 ; 182.626,138.809 183.134,138.813 ; 183.124,26.794 183.642,25.273 ; 183.194,92.097 182.88,138.811 ; 183.328,71.987 183.642,25.273 ; 183.388,25.271 183.896,25.275 ; 183.398,137.29 182.88,138.811 ; 184.14,26.8 183.642,25.273
  text "151.51233 (mm)" at 92.161,144.418 h1.52 r0.24
  text "POWER" at 40.767,136.652 h1.52
  text "READY" at 150.495,136.474 h1.52
  text "SERIAL" at 140.106,136.449 h1.52
  text "LINK" at 159.715,136.042 h1.52
  text "2018.3.25" at 26.695,129.769 h1.52
  text "14ele zc" at 26.746,127 h1.52
  text "POWER" at 160.02,104.775 h1.52
  text "113.54056 (mm)" at 182.281,91.837 h1.52 r270.38
  text "TEST" at 125.019,29.032 h1.52
Top Solder:
  rectangle: 39.954,36.728 52.73,48.311
  rectangle: 38.354,86.487 42.062,93.193
  rectangle: 51.333,55.956 61.824,66.726
  lines w1: 35.992,44.069 35.992,33.528 38.887,30.632 39.014,30.632 ; 38.684,30.836 44.45,30.836 44.501,30.886
Bottom Solder:
  rectangle: 39.954,36.754 52.73,48.285
  rectangle: 38.379,86.462 42.062,93.218
  rectangle: 51.41,55.931 61.874,66.675
  lines w1: 35.941,43.84 35.941,33.503 38.608,30.836 38.913,30.836 44.45,30.836 44.501,30.886
Mechanical 13:
  the board outline again, w0.254

## Text inside footprints (layer, text, board x,y; h text height)
C15: Top Overlay "+" at 43.84,93.701 h1 r90
C16: Top Overlay "+" at 41.554,95.352 h1.52 r90
C17: Top Overlay "+" at 34.036,47.092 h1 r270
C19: Top Overlay "+" at 33.934,56.998 h1 r270
C29: Top Overlay "+" at 70.079,68.885 h1 r180
C31: Top Overlay "+" at 66.34,92.559 h1.52 r270
LCD: Top Overlay "BL" at 112.725,130.378 h0.71; Top Overlay "MISO" at 119.456,130.378 h0.71; Top Overlay "TCS" at 124.917,130.378 h0.71; Top Overlay "MO" at 122.816,136.764 h0.71; Top Overlay "MOSI" at 119.566,136.764 h0.71; Top Overlay "CLK" at 124.816,136.764 h0.71; Top Overlay "PEN" at 122.377,130.378 h0.71; Top Overlay "D11" at 104.724,130.378 h0.71; Top Overlay "GND" at 117.17,130.378 h0.71; Top Overlay "GND" at 109.691,136.764 h0.71; Top Overlay "RD" at 87.191,136.764 h0.71; Top Overlay "D0" at 89.816,136.764 h0.71; Top Overlay "D10" at 102.066,136.764 h0.71; Top Overlay "VDD" at 112.191,136.764 h0.71; Top Overlay "GND" at 114.691,136.764 h0.71; Top Overlay "V5" at 117.316,136.764 h0.71; Top Overlay "VDD" at 114.757,130.378 h0.71; Top Overlay "D15" at 109.804,130.378 h0.71; Top Overlay "D12" at 104.623,136.804 h0.71; Top Overlay "D13" at 107.191,130.264 h0.71; Top Overlay "D9" at 102.311,130.378 h0.71; Top Overlay "D8" at 99.566,136.764 h0.71; Top Overlay "D6" at 97.441,136.764 h0.71; Top Overlay "D5" at 97.358,130.378 h0.71; Top Overlay "D4" at 94.816,136.764 h0.71; Top Overlay "D3" at 94.818,130.378 h0.71; Top Overlay "D2" at 92.316,136.764 h0.71; Top Overlay "D1" at 92.405,130.378 h0.71; Top Overlay "RST" at 89.357,130.378 h0.71; Top Overlay "WR" at 87.198,130.378 h0.71; Top Overlay "CS" at 84.658,130.378 h0.71; Top Overlay "RS" at 84.691,136.764 h0.71; Top Overlay "D7" at 99.771,130.378 h0.71; Top Overlay "D14" at 107.191,136.764 h0.71; Bottom Overlay "CLK" at 124.79,131.013 h0.89 r180; Bottom Overlay "TCS" at 124.79,129.108 h0.89 r180; Bottom Overlay "NC" at 122.631,131.013 h0.89 r180; Bottom Overlay "PEN" at 121.996,129.108 h0.89 r180; Bottom Overlay "MO" at 120.091,131.013 h0.89 r180; Bottom Overlay "MI" at 120.218,129.108 h0.89 r180; Bottom Overlay "V5" at 117.805,131.013 h0.89 r180; Bottom Overlay "GND" at 117.043,129.108 h0.89 r180; Bottom Overlay "GND" at 115.011,131.013 h0.89 r180; Bottom Overlay "VDD" at 114.376,129.108 h0.89 r180; Bottom Overlay "VDD" at 112.344,131.013 h0.89 r180; Bottom Overlay "BL" at 112.471,129.108 h0.89 r180; Bottom Overlay "GND" at 109.677,131.013 h0.89 r180; Bottom Overlay "D15" at 109.677,129.108 h0.89 r180; Bottom Overlay "D14" at 107.137,131.013 h0.89 r180; Bottom Overlay "D13" at 107.01,129.108 h0.89 r180; Bottom Overlay "D12" at 104.47,131.013 h0.89 r180; Bottom Overlay "D11" at 104.47,129.108 h0.89 r180; Bottom Overlay "D10" at 101.803,131.013 h0.89 r180; Bottom Overlay "D9" at 102.184,129.108 h0.89 r180; Bottom Overlay "D8" at 99.771,131.013 h0.89 r180; Bottom Overlay "D7" at 99.771,129.108 h0.89 r180; Bottom Overlay "D6" at 97.358,131.013 h0.89 r180; Bottom Overlay "D5" at 97.358,129.108 h0.89 r180; Bottom Overlay "D4" at 94.691,131.013 h0.89 r180; Bottom Overlay "D3" at 94.691,129.108 h0.89 r180; Bottom Overlay "D2" at 92.151,131.013 h0.89 r180; Bottom Overlay "D1" at 92.278,129.108 h0.89 r180; Bottom Overlay "RST" at 89.23,129.108 h0.89 r180; Bottom Overlay "D0" at 89.611,131.013 h0.89 r180; Bottom Overlay "WR" at 87.071,129.108 h0.89 r180; Bottom Overlay "RD" at 87.071,131.013 h0.89 r180; Bottom Overlay "RS" at 84.404,131.013 h0.89 r180; Bottom Overlay "CS" at 84.277,129.108 h0.89 r180